# Altium PCB LKS_Motor_0318.PcbDoc (part 2 of 2)
Units mm, origin at the board's own origin, x right, y up, seen from the top; angles counter-clockwise.
Board outline 117 x 10 mm, 2 copper layers (Top Layer, Bottom Layer); 107 components, 71 nets, 323 pads, 186 vias.
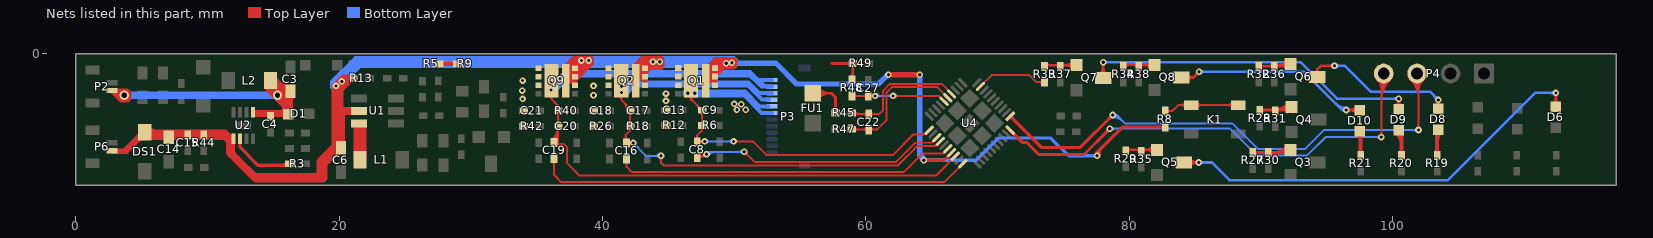
[diagram p2: the nets of this part, all layers, seen from the top]

## Via types
v1: diameter 0.5, hole 0.25, Top Layer to Bottom Layer, 184 vias
v2: diameter 0.7, hole 0.4, Top Layer to Bottom Layer, 2 vias

## Nets (pads, with @x,y where several pads share a name; then routed paths per layer and width w, separated by ;. In a path a pad name is that pad's centre, name@x,y a point inside that pad or via, vN(x,y) a via of type N, cw(c..) or ccw(c..) an arc to the next point about the centre after c; other vN are vias at no path point) (continued)
NetD6_2: D6.2 Q5.3 | length 37.4
  Top Layer w0.2: Q5.3@84.15,-8.255 v1(85.293,-8.255) ; Q5.3@84.581,-8.508 cw(c85.19,-9.117) 85.19,-8.255 cw(c85.19,-7.393) Q5.3@84.581,-8.002 ; v1@85.187,-8.361 ccw(c84.931,-8.617) 84.931,-8.255 ccw(c84.931,-7.893) v1@85.187,-8.149 ; D6.2@112.205,-3.814 ccw(c111.693,-3.302) 112.417,-3.302 ccw(c113.141,-3.302) D6.2@112.629,-3.814 ; v1@112.314,-3.078 cw(c112.067,-3.326) 112.417,-3.326 ; D6.2@112.417,-4.027 112.417,-2.975 v1(112.42,-2.972) ; 112.417,-3.342 cw(c112.791,-3.342) v1@112.526,-3.078
  Bottom Layer w0.2: v1(85.293,-8.255) 86.284,-8.255 87.63,-9.601 104.216,-9.601 110.846,-2.972 v1(112.42,-2.972) ; v1@85.399,-8.361 cw(c85.655,-8.617) 85.655,-8.255 cw(c85.655,-7.893) v1@85.399,-8.149 ; v1@112.314,-3.078 ccw(c112.058,-3.334) 112.058,-2.972 ccw(c112.058,-2.61) v1@112.314,-2.866
NetD8_1: D8.1 R19.1 | length 2.8
  Top Layer w0.3: D8.1@103.306,-5.955 cw(c103.072,-6.189) 103.403,-6.189 ; R19.1@103.403,-7.696 D8.1@103.403,-5.857 ; 103.403,-6.574 cw(c104.279,-6.574) D8.1@103.66,-5.955
NetD8_2: D8.2 Q6.3 | length 15.1
  Top Layer w0.2: Q6.3@94.135,-1.428 ccw(c94.026,-1.194) 94.285,-1.194 ; Q6.3@94.285,-1.753 94.285,-1.194 ; Q6.3@94.435,-1.428 cw(c94.543,-1.194) 94.285,-1.194 ; v1@95.5,-1.02 ccw(c95.243,-1.277) 95.243,-0.914 ccw(c95.243,-0.552) v1@95.5,-0.808 ; v1(95.606,-0.914) 94.564,-0.914 94.285,-1.194 ; D8.2@103.314,-3.927 ccw(c103.122,-3.629) v1@103.476,-3.629 ; v1@103.374,-3.611 cw(c103.126,-3.859) D8.2@103.476,-3.859 ; D8.2@103.476,-4.179 v1@103.476,-3.629 ; D8.2@103.476,-3.876 cw(c103.85,-3.876) v1@103.586,-3.611 ; D8.2@103.639,-3.927 cw(c103.831,-3.629) v1@103.476,-3.629
  Bottom Layer w0.2: v1(95.606,-0.914) 96.393,-0.914 98.349,-2.87 102.845,-2.87 v1(103.48,-3.505) ; v1@95.712,-1.02 cw(c95.968,-1.277) 95.968,-0.914 cw(c95.968,-0.552) v1@95.712,-0.808 ; v1@103.33,-3.505 ccw(c102.967,-3.505) 103.224,-3.249 ccw(c103.48,-2.993) v1@103.48,-3.355
NetD9_1: D9.1 R20.1 | length 3.1
  Top Layer w0.3: D9.1@100.309,-5.98 cw(c99.4,-6.889) 100.686,-6.889 ; D9.1@100.521,-5.768 cw(c100.124,-6.165) D9.1@100.686,-6.165 ; R20.1@100.686,-7.696 D9.1@100.686,-6.003
NetD9_2: D9.2 Q7.3 | length 30.4
  Top Layer w0.2: Q7.3@77.776,-1.576 ccw(c77.166,-0.966) 78.029,-0.966 ccw(c78.891,-0.966) Q7.3@78.281,-1.576 ; v1@77.923,-0.741 cw(c77.667,-0.997) 78.029,-0.997 cw(c78.391,-0.997) v1@78.135,-0.741 ; Q7.3@78.029,-1.829 v1(78.029,-0.635) ; D9.2@100.267,-3.992 ccw(c99.746,-3.472) v1@100.482,-3.472 ; v1@100.376,-3.51 cw(c100.12,-3.766) 100.482,-3.766 cw(c100.845,-3.766) v1@100.588,-3.51 ; D9.2@100.479,-4.204 100.482,-4.201 v1(100.482,-3.404) ; v1@100.482,-3.488 ccw(c101.195,-3.488) D9.2@100.691,-3.992
  Bottom Layer w0.2: v1(78.029,-0.635) 93.015,-0.635 95.783,-3.404 v1(100.482,-3.404) ; v1@78.135,-0.741 cw(c78.391,-0.997) 78.391,-0.635 cw(c78.391,-0.273) v1@78.135,-0.529 ; v1@100.376,-3.51 ccw(c100.12,-3.766) 100.12,-3.404 ccw(c100.12,-3.041) v1@100.376,-3.298
NetD10_1: D10.1 R21.1 | length 2.7
  Top Layer w0.3: D10.1@97.337,-6.056 cw(c96.735,-6.659) 97.587,-6.659 ; R21.1@97.587,-7.696 D10.1@97.587,-5.952 ; 97.587,-6.307 cw(c97.942,-6.307) D10.1@97.691,-6.056
NetD10_2: D10.2 Q8.3 | length 20.2
  Top Layer w0.2: Q8.3@83.972,-1.803 84.887,-1.803 ; Q8.3@84.431,-2.025 cw(c84.887,-2.384) 84.887,-1.803 ; Q8.3@84.431,-1.582 ccw(c84.887,-1.223) 84.887,-1.803 ; v1@85.169,-1.372 cw(c84.806,-1.372) 85.063,-1.628 cw(c85.319,-1.884) v1@85.319,-1.522 ; v1(85.319,-1.372) 84.887,-1.803 ; v1(96.495,-4.267) 97.494,-4.267 D10.2@97.507,-4.281 ; v1@96.601,-4.373 cw(c96.857,-4.629) 96.857,-4.267 cw(c96.857,-3.905) v1@96.601,-4.161 ; 96.751,-4.267 cw(c96.751,-5.037) D10.2@97.295,-4.493 ; 96.815,-4.267 ccw(c96.815,-3.588) D10.2@97.295,-4.068
  Bottom Layer w0.2: v1(85.319,-1.372) 93.294,-1.372 96.19,-4.267 v1(96.495,-4.267) ; v1@85.425,-1.478 cw(c85.681,-1.734) 85.681,-1.372 cw(c85.681,-1.009) v1@85.425,-1.266 ; 95.718,-3.796 ccw(c96.495,-3.019) v1@96.495,-4.117 ; 96.06,-4.137 ccw(c96.495,-3.702) v1@96.495,-4.317
NetK1_1: K1.1 R8.1 | length 9.5
  Top Layer w0.15: R8.1@82.753,-4.343 83.287,-4.343 83.73,-3.9 K1.1@84.725,-3.9 K1.1@88.275,-3.9 ; R8.1@82.88,-4.47 cw(c83.185,-4.776) 83.185,-4.343 cw(c83.185,-3.911) R8.1@82.88,-4.217 ; K1.1@84.331,-4.095 ccw(c83.861,-4.564) 83.861,-3.9 ccw(c83.861,-3.236) K1.1@84.331,-3.706 ; K1.1@85.12,-4.095 cw(c85.589,-4.564) 85.589,-3.9 cw(c85.589,-3.236) K1.1@85.12,-3.706 ; K1.1@87.88,-4.095 ccw(c87.411,-4.564) 87.411,-3.9 ccw(c87.411,-3.236) K1.1@87.88,-3.706
NetL1_1: L1.1 U1.6 | length 20.9
  Top Layer w0.3: U1.6@21.105,-5.399 cw(c20.738,-5.767) 21.257,-5.767 ; L1.1@21.257,-7.998 U1.6@21.257,-5.319 ; 21.257,-6.976 ccw(c22.516,-6.976) L1.1@21.626,-7.866 ; 21.257,-6.252 ccw(c23.24,-6.252) 21.838,-7.654 cw(c22.627,-6.865) 21.511,-6.865 ; U1.6@21.405,-5.399 cw(c21.149,-5.656) 21.511,-5.656 cw(c21.873,-5.656) U1.6@21.617,-5.399 ; 21.511,-7.249 cw(c20.937,-7.249) L1.1@21.343,-7.654 ; U1.6@21.511,-5.293 21.511,-7.972 L1.1@21.59,-8.052 ; U1.6@21.705,-5.399 cw(c21.192,-5.912) 21.917,-5.912 ; L1.1@21.765,-7.947 U1.6@21.765,-5.268 ; 21.765,-7.36 cw(c21.048,-7.36) 21.555,-7.866 ccw(c20.68,-6.992) 21.917,-6.992 ; 21.765,-6.635 cw(c20.324,-6.635) L1.1@21.343,-7.654 ; 21.765,-5.767 cw(c22.284,-5.767) U1.6@21.917,-5.399 ; L1.1@21.917,-8.074 U1.6@21.917,-5.395 ; 21.917,-6.267 cw(c19.956,-6.267) L1.1@21.343,-7.654
NetQ3_1: Q3.1 R27.1 R30.1 | length 10.1
  Top Layer w0.2: R27.1@89.383,-7.493 R30.1@90.576,-7.493 91.77,-7.493 ; R27.1@89.491,-7.602 cw(c89.754,-7.865) 89.754,-7.493 cw(c89.754,-7.121) R27.1@89.491,-7.384 ; R30.1@90.468,-7.602 ccw(c90.205,-7.865) 90.205,-7.493 ccw(c90.205,-7.121) R30.1@90.468,-7.384 ; R30.1@90.602,-7.62 91.237,-7.62 91.465,-7.391 ; R30.1@90.685,-7.678 cw(c90.826,-7.818) R30.1@90.826,-7.62 ; R30.1@90.685,-7.602 cw(c90.948,-7.865) 90.948,-7.493 cw(c90.948,-7.121) R30.1@90.685,-7.384 ; R30.1@90.685,-7.46 ccw(c91.071,-7.075) 91.071,-7.62 ; 90.9,-7.493 ccw(c90.9,-5.937) Q3.1@92,-7.037 ; 91.383,-7.493 ccw(c91.383,-6.42) Q3.1@92.142,-7.179 ; 91.636,-7.391 cw(c91.636,-7.907) Q3.1@92,-7.542 ; Q3.1@91.872,-7.391 91.745,-7.391 ; Q3.1@91.942,-7.114 cw(c91.465,-6.844) 91.465,-7.391 ; 91.465,-7.391 91.745,-7.391 ; 91.745,-7.391 cw(c91.745,-7.667) 91.966,-7.503 ccw(c91.745,-7.667) 91.745,-7.391 ; 91.745,-7.391 ccw(c91.745,-7.238) 91.897,-7.254 cw(c91.745,-7.238) 91.745,-7.391
NetQ4_1: Q4.1 R28.1 R31.1 | length 6.8
  Top Layer w0.2: R28.1@89.84,-4.267 Q4.1@92.151,-4.267 ; R28.1@90.025,-4.401 cw(c90.349,-4.726) 90.349,-4.267 ; R28.1@90.025,-4.184 ccw(c90.226,-3.982) 90.226,-4.267 ; 90.677,-4.267 ccw(c90.677,-3.809) R31.1@91.001,-4.133 ; 90.799,-4.267 cw(c90.799,-4.552) R31.1@91.001,-4.351 ; R31.1@90.915,-4.267 ccw(c90.915,-2.624) Q4.1@92.076,-3.786 ; R31.1@91.219,-4.351 cw(c91.42,-4.552) 91.42,-4.267 ; R31.1@91.219,-4.133 ccw(c91.543,-3.809) 91.543,-4.267 ; 91.398,-4.267 ccw(c91.398,-3.107) Q4.1@92.218,-3.927 ; Q4.1@91.88,-4.267 ccw(c91.88,-3.59) Q4.1@92.359,-4.069
NetQ5_1: Q5.1 R29.1 R35.1 | length 5.5
  Top Layer w0.2: R29.1@79.731,-7.366 79.807,-7.29 Q5.1@82.118,-7.29 ; R29.1@79.865,-7.399 cw(c80.128,-7.662) 80.128,-7.29 cw(c80.128,-6.918) R29.1@79.865,-7.181 ; 80.491,-7.29 cw(c80.491,-7.748) R35.1@80.816,-7.424 ; 80.614,-7.29 ccw(c80.614,-7.005) R35.1@80.816,-7.206 ; R35.1@81.033,-7.424 cw(c81.358,-7.748) 81.358,-7.29 ; R35.1@81.033,-7.206 ccw(c81.235,-7.005) 81.235,-7.29 ; Q5.1@81.866,-7.542 ccw(c81.256,-8.152) 81.256,-7.29 ccw(c81.256,-6.427) Q5.1@81.866,-7.037
NetQ6_1: Q6.1 R32.1 R36.1 | length 6.3
  Top Layer w0.2: R32.1@89.84,-0.94 R36.1@91.034,-0.94 ; R32.1@89.949,-1.049 cw(c90.212,-1.312) 90.212,-0.94 cw(c90.212,-0.568) R32.1@89.949,-0.831 ; R36.1@90.925,-1.049 ccw(c90.662,-1.312) 90.662,-0.94 ccw(c90.662,-0.568) R36.1@90.925,-0.831 ; R36.1@91.142,-1.049 cw(c91.405,-1.312) 91.405,-0.94 cw(c91.405,-0.568) R36.1@91.142,-0.831 ; 91.512,-0.94 ccw(c91.512,-0.056) Q6.1@92.141,-0.677 ; 91.758,-0.94 cw(c91.758,-1.282) Q6.1@92,-1.04 ; Q6.1@91.999,-0.536 cw(c91.034,0.416) R36.1@91.034,-0.94 ; Q6.1@92.253,-0.787 92.1,-0.94 R36.1@91.034,-0.94
NetQ7_1: Q7.1 R33.1 R37.1 | length 5.6
  Top Layer w0.2: R33.1@73.558,-0.94 73.635,-0.864 Q7.1@75.997,-0.864 ; R33.1@73.693,-0.972 cw(c73.956,-1.235) 73.956,-0.864 cw(c73.956,-0.492) R33.1@73.693,-0.755 ; R37.1@74.669,-0.972 ccw(c74.406,-1.235) 74.406,-0.864 ccw(c74.406,-0.492) R37.1@74.669,-0.755 ; R37.1@74.886,-0.972 cw(c75.149,-1.235) 75.149,-0.864 cw(c75.149,-0.492) R37.1@74.886,-0.755 ; Q7.1@75.744,-1.116 ccw(c75.134,-1.726) 75.134,-0.864 ccw(c75.134,-0.001) Q7.1@75.744,-0.611
NetQ8_1: Q8.1 R34.1 R38.1 | length 5.6
  Top Layer w0.2: R34.1@79.527,-0.94 79.629,-0.838 Q8.1@81.94,-0.838 ; R34.1@79.662,-0.972 cw(c79.986,-1.297) 79.986,-0.838 ; R34.1@79.662,-0.755 ccw(c79.863,-0.553) 79.863,-0.838 ; 80.313,-0.838 cw(c80.313,-1.297) R38.1@80.638,-0.972 ; 80.436,-0.838 ccw(c80.436,-0.553) R38.1@80.638,-0.755 ; R38.1@80.855,-0.972 cw(c81.18,-1.297) 81.18,-0.838 ; R38.1@80.855,-0.755 ccw(c81.057,-0.553) 81.057,-0.838 ; Q8.1@81.688,-1.091 ccw(c81.078,-1.701) 81.078,-0.838 ccw(c81.078,0.024) Q8.1@81.688,-0.586
NetR3_1: R3.1 U2.6 | length 5.5
  Top Layer w0.254: U2.6@12.475,-6.436 12.475,-7.116 13.818,-8.458 R3.1@16.231,-8.458 ; 15.603,-8.458 ccw(c15.603,-7.805) R3.1@16.065,-8.267
NetR5_2: R5.2 R9.1 | length 1.4
  Top Layer w0.3: R5.2@27.508,-0.762 R9.1@28.905,-0.762
OC: C27.2 R48.2 U4.16 | length 13
  Top Layer w0.15: R48.2@58.953,-3.2 60.782,-3.2 v1(60.706,-3.2) ; R48.2@59.08,-3.327 cw(c59.386,-3.633) 59.386,-3.2 cw(c59.386,-2.768) R48.2@59.08,-3.074 ; 59.705,-3.2 cw(c59.705,-3.719) C27.2@60.071,-3.352 ; 59.827,-3.2 ccw(c59.827,-2.855) C27.2@60.071,-3.099 ; C27.2@60.325,-3.352 cw(c60.691,-3.719) v1@60.691,-3.2 ; C27.2@60.325,-3.099 ccw(c60.569,-2.855) v1@60.569,-3.2 ; v1@60.582,-3.324 ccw(c60.284,-3.623) 60.284,-3.2 ccw(c60.284,-2.778) v1@60.582,-3.077 ; v1(62.078,-3.2) 65.54,-3.2 U4.16@65.952,-3.613 ; v1@62.201,-3.324 cw(c62.5,-3.623) 62.5,-3.2 cw(c62.5,-2.778) v1@62.201,-3.077
  Bottom Layer w0.15: v1@60.731,-3.2 60.782,-3.2 61.57,-3.2 ; v1@60.83,-3.324 cw(c61.128,-3.623) 61.128,-3.2 cw(c61.128,-2.778) v1@60.83,-3.077 ; v1@61.925,-3.2 61.57,-3.2 ; v1(62.078,-3.2) 61.57,-3.2 ; 61.655,-3.2 cw(c61.655,-3.623) 61.954,-3.324 ccw(c61.655,-3.623) 61.655,-3.2 ; 61.655,-3.2 ccw(c61.655,-2.778) 61.954,-3.077 cw(c61.655,-2.778) 61.655,-3.2
OPA0_IN: C22.1 R47.2 U4.15 | length 12.3
  Top Layer w0.15: R47.2@58.979,-5.791 R47.2@58.928,-5.74 60.884,-5.74 61.57,-5.055 61.57,-2.946 61.976,-2.54 65.445,-2.54 U4.15@66.235,-3.33 ; R47.2@59.131,-5.867 cw(c59.436,-6.173) 59.436,-5.74 cw(c59.436,-5.308) R47.2@59.131,-5.614 ; 59.73,-5.74 ccw(c59.73,-5.222) C22.1@60.097,-5.588 ; 59.853,-5.74 cw(c59.853,-6.086) C22.1@60.097,-5.842 ; C22.1@60.35,-5.842 cw(c60.594,-6.086) 60.594,-5.74 ; C22.1@60.35,-5.588 ccw(c60.717,-5.222) 60.717,-5.74
OPA0_IP: C22.2 R45.2 U4.14 | length 11.9
  Top Layer w0.15: R45.2@59.004,-4.572 C22.2@60.223,-4.572 61.036,-4.572 61.316,-4.293 61.316,-2.794 61.824,-2.286 65.757,-2.286 U4.14@66.518,-3.047 ; R45.2@59.025,-4.475 ccw(c59.258,-4.242) R45.2@59.258,-4.572 ; R45.2@59.131,-4.622 cw(c59.252,-4.744) R45.2@59.252,-4.572 ; R45.2@59.131,-4.369 ccw(c59.62,-3.88) 59.62,-4.572 ; C22.2@60.097,-4.699 ccw(c59.791,-5.004) 59.791,-4.572 ccw(c59.791,-4.14) C22.2@60.097,-4.445 ; C22.2@60.35,-4.699 cw(c60.656,-5.004) 60.656,-4.572 cw(c60.656,-4.14) C22.2@60.35,-4.445
PGND: C13.1 C18.1 C21.1 FU1.2 Q1.5 Q1.6 Q1.7 Q2.5 Q2.6 Q2.7 Q9.5 Q9.6 Q9.7 R12.2 R26.2 R42.2 R45.1 R48.1 R49.1 | length 11.3
  Top Layer w0.203: FU1.2@55.982,-2.997 57.404,-2.997 57.709,-3.302 R45.1@57.709,-4.496 ; FU1.2@56.215,-3.231 cw(c56.779,-3.794) 56.779,-2.997 cw(c56.779,-2.2) FU1.2@56.215,-2.764 ; FU1.2@56.359,-3.374 cw(c57.269,-4.285) 57.269,-2.997 cw(c57.269,-1.709) FU1.2@56.359,-2.62 ; 57.429,-0.711 57.455,-0.737 R49.1@59.004,-0.737 59.004,-1.93 R48.1@58.953,-1.981 ; R45.1@57.601,-4.388 ccw(c57.341,-4.128) 57.709,-4.128 ccw(c58.077,-4.128) R45.1@57.817,-4.388 ; R49.1@58.82,-0.844 ccw(c58.56,-1.105) 58.56,-0.737 ccw(c58.56,-0.369) R49.1@58.82,-0.629 ; R48.1@58.846,-1.797 ccw(c58.463,-1.414) 59.004,-1.414 ; R49.1@58.896,-0.844 cw(c58.636,-1.105) 59.004,-1.105 cw(c59.372,-1.105) R49.1@59.112,-0.844
  other v1: 50.216,-4.242 50.876,-4.242 50.546,-3.835 50.013,-3.81 44.831,-3.581 33.934,-3.429 39.319,-3.15 44.831,-3.023 33.909,-2.794 39.319,-2.438 33.934,-2.032
RED: R33.2 U4.9 | length 6.1
  Top Layer w0.15: U4.9@68.71,-2.482 69.592,-1.6 72.39,-1.6 72.949,-2.159 R33.2@73.558,-2.159 ; R33.2@73.457,-2.286 ccw(c73.152,-2.591) 73.152,-2.159 ccw(c73.152,-1.727) R33.2@73.457,-2.032
SWCLK: P4.4 U4.40 | length 45.3
  Top Layer w0.15: P4.4@98.862,-1.976 cw(c98.139,-2.699) 99.162,-2.699 ; P4.4@98.968,-1.87 cw(c98.501,-2.337) 99.162,-2.337 ; v1@99.038,-6.201 ccw(c98.739,-5.902) 99.162,-5.902 ccw(c99.584,-5.902) v1@99.285,-6.201 ; v1(99.162,-6.325) 99.162,-1.6 P4.4@99.339,-1.422 ; 99.162,-3.557 cw(c101.398,-3.557) P4.4@99.817,-1.976 ; 99.162,-3.195 cw(c101.036,-3.195) P4.4@99.711,-1.87 ; 99.162,-2.833 cw(c100.674,-2.833) P4.4@99.605,-1.764 ; 99.162,-2.471 cw(c100.312,-2.471) P4.4@99.498,-1.658
  Top Layer w0.24: U4.40@70.973,-5.805 71.899,-6.731 72.212,-6.731 73.127,-7.645 76.581,-7.645 v1(78.537,-5.69) ; v1@78.407,-5.69 cw(c78.093,-5.69) 78.315,-5.912 cw(c78.537,-6.133) v1@78.537,-5.82
  Bottom Layer w0.15: v1(78.537,-5.69) 87.681,-5.69 89.713,-7.722 93.523,-7.722 94.92,-6.325 v1(99.162,-6.325) v1@99.187,-6.35 ; v1@78.661,-5.813 cw(c78.959,-6.112) 78.959,-5.69 cw(c78.959,-5.267) v1@78.661,-5.566 ; v1@99.038,-6.448 ccw(c98.739,-6.747) 98.739,-6.325 ccw(c98.739,-5.902) v1@99.038,-6.201
SWDIO: P4.3 U4.1 | length 48.8
  Top Layer w0.15: P4.3@101.402,-1.976 cw(c100.005,-3.373) 101.981,-3.373 ; P4.3@101.508,-1.87 cw(c100.367,-3.011) 101.981,-3.011 ; P4.3@101.614,-1.764 cw(c100.729,-2.649) 101.981,-2.649 ; P4.3@101.72,-1.658 cw(c101.091,-2.287) 101.981,-2.287 ; v1@101.857,-5.667 ccw(c101.559,-5.369) 101.981,-5.369 ccw(c102.403,-5.369) v1@102.105,-5.667 ; v1(101.981,-5.791) P4.3@101.981,-1.524 ; 101.981,-2.883 cw(c103.264,-2.883) P4.3@102.357,-1.976 ; 101.981,-2.521 cw(c102.902,-2.521) P4.3@102.251,-1.87
  Top Layer w0.24: U4.1@71.089,-4.744 U4.1@70.973,-4.744 73.341,-7.112 76.302,-7.112 v1(78.765,-4.648) ; v1@78.635,-4.648 cw(c78.322,-4.648) 78.543,-4.87 cw(c78.765,-5.092) v1@78.765,-4.778
  Bottom Layer w0.15: v1@78.765,-4.823 cw(c78.765,-5.92) 79.541,-5.145 ; v1@78.765,-4.673 cw(c78.765,-5.408) 79.285,-4.888 ; v1(78.765,-4.648) 79.045,-4.648 79.705,-5.309 87.859,-5.309 89.764,-7.214 93.37,-7.214 94.793,-5.791 v1(101.981,-5.791) ; v1@78.765,-4.523 cw(c78.765,-4.896) 79.029,-4.632 ; v1@101.857,-5.915 ccw(c101.559,-6.214) 101.559,-5.791 ccw(c101.559,-5.369) v1@101.857,-5.667
U: C19.1 C20.1 P3.1 P3.2 Q9.10 R40.2 U4.28 | length 96
  Top Layer w0.15: Q9.10@35.97,-2.867 cw(c35.603,-3.233) Q9.10@36.121,-3.233 ; Q9.10@35.97,-2.619 ccw(c35.603,-2.253) Q9.10@36.121,-2.253 ; Q9.10@35.97,-2.359 cw(c35.603,-2.725) Q9.10@36.121,-2.725 ; Q9.10@35.979,-3.235 cw(c35.915,-3.432) 36.121,-3.432 ; Q9.10@36.121,-3.098 cw(c36.448,-3.098) Q9.10@36.217,-2.867 ; Q9.10@36.121,-2.59 cw(c36.448,-2.59) Q9.10@36.217,-2.359 ; Q9.10@36.121,-2.388 ccw(c36.448,-2.388) Q9.10@36.217,-2.619 ; Q9.10@36.121,-2.063 36.121,-3.432 ; C19.1@36.195,-6.528 ccw(c35.154,-5.487) C20.1@36.627,-5.487 ; Q9.10@36.264,-3.235 ccw(c36.328,-3.432) 36.121,-3.432 ; C19.1@36.301,-6.634 ccw(c35.516,-5.849) 36.627,-5.849 ; C19.1@36.408,-6.74 ccw(c35.878,-6.211) 36.627,-6.211 ; C19.1@36.449,-6.934 cw(c36.67,-7.156) 36.67,-6.842 ; C19.1@36.449,-6.681 ccw(c36.838,-6.291) 36.838,-6.842 ; C19.1@36.461,-6.92 cw(c36.624,-7.05) 36.624,-6.842 ; C19.1@36.491,-6.748 ccw(c36.624,-6.701) 36.624,-6.842 ; C19.1@36.514,-6.846 ccw(c36.24,-6.573) 36.627,-6.573 ; C20.1@36.524,-5.629 cw(c36.276,-5.877) 36.627,-5.877 ; C20.1@36.524,-5.375 ccw(c36.276,-5.127) 36.627,-5.127 ; R40.2@36.524,-4.46 cw(c36.276,-4.708) 36.627,-4.708 ; R40.2@36.524,-4.207 ccw(c36.276,-3.959) 36.627,-3.959 ; 36.627,-6.782 36.627,-3.937 ; 36.627,-5.992 cw(c37.14,-5.992) C20.1@36.777,-5.629 ; 36.627,-5.012 ccw(c37.14,-5.012) C20.1@36.777,-5.375 ; 36.627,-4.823 cw(c37.14,-4.823) R40.2@36.777,-4.46 ; R40.2@36.755,-4.188 cw(c36.937,-3.937) 36.627,-3.937 ; U4.28@66.801,-7.785 65.34,-9.246 38.252,-9.246 37.313,-8.306 37.313,-7.087 37.068,-6.842 36.624,-6.842 ; 36.121,-3.432 36.627,-3.937
  Bottom Layer w0.3: v1@36.023,-2.306 cw(c35.607,-2.722) v1@36.195,-2.722 ; v1@36.042,-2.657 ccw(c35.881,-2.388) v1@36.195,-2.388 ; v1@36.042,-2.321 cw(c35.852,-2.637) v1@36.22,-2.637 ; v1@36.046,-2.655 ccw(c35.887,-2.362) v1@36.22,-2.362 ; v1(36.093,-2.743) 37.465,-1.372 37.211,-1.372 ; v1@36.093,-2.643 ccw(c36.093,-1.543) 36.871,-2.321 ; v1@36.093,-2.435 ccw(c36.093,-1.692) 36.619,-2.217 ; v1@36.14,-2.655 cw(c36.398,-2.159) 35.839,-2.159 ; v1@36.174,-2.683 cw(c36.355,-2.548) v1@36.195,-2.388 ; v1@36.22,-2.616 v1@36.22,-2.362 ; 36.698,-1.885 cw(c36.093,-1.281) 36.093,-2.135 ccw(c36.093,-0.667) 37.131,-1.705 ; 51.828,-1.993 P3.1@52.883,-1.993 ; 52.006,-2.171 51.486,-1.651 50.673,-1.651 37.541,-1.651 36.297,-2.896 35.839,-2.896 ; 52.08,-2.245 ccw(c52.642,-1.684) P3.2@52.642,-2.478 ; P3.2@52.603,-2.489 52.07,-2.489 50.952,-1.372 ; P3.2@52.883,-2.493 52.328,-2.493 51.206,-1.372 50.952,-1.372 ; 35.839,-2.896 36.195,-2.896 v1@36.195,-2.388 ; 35.839,-2.896 35.839,-2.515 ; 35.839,-2.515 35.839,-2.159 ; 35.839,-2.515 36.068,-2.515 v1@36.22,-2.362 ; 35.839,-2.159 36.424,-2.159 37.211,-1.372 ; v1@36.195,-2.388 v1@36.22,-2.362 ; v1@36.22,-2.362 ccw(c36.412,-2.554) 36.179,-2.692 cw(c36.412,-2.554) v1@36.22,-2.362 ; 37.211,-1.372 50.673,-1.372 50.952,-1.372
  other v1: 36.093,-2.235
V: C16.1 C17.1 P3.3 P3.4 Q2.10 R18.2 U4.24 | length 81.2
  Top Layer w0.15: Q2.10@41.256,-3.224 cw(c41.151,-3.482) 41.43,-3.482 ; Q2.10@41.329,-3.07 cw(c41.085,-3.314) Q2.10@41.43,-3.314 ; Q2.10@41.329,-2.823 ccw(c41.085,-2.579) Q2.10@41.43,-2.579 ; Q2.10@41.329,-2.613 cw(c41.085,-2.857) Q2.10@41.43,-2.857 ; Q2.10@41.329,-2.365 ccw(c41.085,-2.122) Q2.10@41.43,-2.122 ; 41.43,-3.424 cw(c41.93,-3.424) Q2.10@41.577,-3.07 ; Q2.10@41.43,-2.967 cw(c41.93,-2.967) Q2.10@41.577,-2.613 ; Q2.10@41.43,-2.469 ccw(c41.93,-2.469) Q2.10@41.577,-2.823 ; 41.556,-3.608 cw(c40.831,-4.334) C17.1@41.856,-4.334 ; Q2.10@41.566,-2.356 cw(c41.813,-2.063) Q2.10@41.43,-2.063 41.43,-3.482 ; Q2.10@41.604,-3.224 ccw(c41.71,-3.482) 41.43,-3.482 ; C16.1@41.706,-6.569 ccw(c41.584,-6.448) C16.1@41.756,-6.448 ; 41.812,-3.865 cw(c41.343,-4.334) C17.1@42.006,-4.334 ; C16.1@41.947,-6.559 cw(c42.292,-6.148) 41.756,-6.148 ; C16.1@41.959,-6.899 cw(c42.264,-7.204) 42.264,-6.772 cw(c42.264,-6.34) C16.1@41.959,-6.645 ; R18.2@41.985,-5.375 ccw(c41.679,-5.07) 42.112,-5.07 ccw(c42.544,-5.07) R18.2@42.238,-5.375 ; C17.1@41.985,-4.46 cw(c41.679,-4.766) 42.112,-4.766 cw(c42.544,-4.766) C17.1@42.238,-4.46 ; R18.2@42.031,-5.662 cw(c41.965,-5.793) 42.112,-5.793 ; R18.2@42.192,-5.662 ccw(c42.258,-5.793) 42.112,-5.793 ; v1@42.208,-6.896 ccw(c41.909,-7.194) 41.909,-6.772 ccw(c41.909,-6.349) v1@42.208,-6.648 ; v1(42.332,-6.772) C16.1@41.832,-6.772 41.756,-6.772 41.756,-6.148 ; v1@44.326,-7.871 cw(c44.028,-8.169) 44.45,-8.169 cw(c44.872,-8.169) v1@44.574,-7.871 ; v1(44.45,-7.747) 44.45,-8.28 44.654,-8.484 62.432,-8.484 63.902,-7.015 65.308,-7.015 U4.24@65.67,-6.654 ; 65.018,-7.015 ccw(c65.018,-6.469) U4.24@65.404,-6.855 ; 41.43,-3.482 42.112,-4.164 C17.1@42.112,-4.334 R18.2@42.112,-5.502 42.112,-5.793 ; 41.756,-6.148 42.112,-5.793
  Bottom Layer w0.15: v1@42.332,-6.947 cw(c42.332,-7.369) 42.631,-7.071 cw(c42.929,-6.772) v1@42.507,-6.772 ; v1(42.332,-6.772) 43.307,-7.747 v1(44.45,-7.747) ; v1@44.326,-7.871 ccw(c44.028,-8.169) 44.028,-7.747 ccw(c44.028,-7.325) v1@44.326,-7.623
  Bottom Layer w0.3: 41.148,-2.769 ccw(c41.551,-2.769) v1@41.356,-3.122 ; 41.148,-2.672 cw(c41.559,-2.672) v1@41.352,-2.316 ; 41.173,-2.896 v1@41.453,-2.896 ; 41.173,-2.861 ccw(c41.459,-2.861) v1@41.439,-3.146 ; 41.173,-2.63 cw(c41.537,-2.63) v1@41.35,-2.318 ; 41.173,-2.489 41.173,-2.54 ; v1@41.412,-2.685 ccw(c41.492,-2.299) 41.771,-2.578 ; v1@41.453,-3.146 ccw(c41.453,-2.525) 41.892,-2.965 ; v1@41.454,-2.389 ccw(c41.462,-1.863) 41.834,-2.235 ; v1@41.46,-2.847 cw(c41.481,-2.54) 41.173,-2.54 ; v1@41.473,-2.391 ccw(c41.627,-1.647) 42.164,-2.184 ; v1@41.501,-2.859 cw(c41.831,-2.261) 41.148,-2.261 ; v1@41.504,-3.124 41.504,-3.073 42.393,-2.184 ; v1@41.553,-2.946 cw(c41.917,-2.946) 41.659,-2.689 ; v1@41.553,-2.943 cw(c42.513,-2.915) 41.834,-2.235 ; 41.927,-2.65 cw(c41.453,-2.176) 41.453,-2.846 ccw(c41.453,-1.501) 42.404,-2.452 ; 49.606,-2.413 49.783,-2.413 ; 50.368,-2.413 50.114,-2.413 ; 50.521,-2.184 50.267,-2.184 ; 51.459,-2.564 51.308,-2.413 ; P3.4@52.654,-3.48 52.121,-3.48 51.054,-2.413 ; P3.3@52.883,-2.993 51.888,-2.993 51.079,-2.184 ; 41.148,-3.124 41.148,-2.261 ; 41.148,-3.124 41.732,-3.124 42.443,-2.413 50.114,-2.413 ; 41.148,-3.124 41.173,-3.099 41.173,-2.54 ; 41.148,-2.261 41.224,-2.184 41.834,-2.184 ; 41.173,-2.54 41.529,-2.184 41.834,-2.184 ; v1@41.453,-2.896 42.164,-2.184 ; v1@41.453,-2.896 41.453,-2.616 41.834,-2.235 ; 41.834,-2.235 41.834,-2.184 ; 41.834,-2.184 42.164,-2.184 ; 42.164,-2.184 42.393,-2.184 ; 42.393,-2.184 49.632,-2.184 ; 49.632,-2.184 50.267,-2.184 ; 49.632,-2.184 49.886,-2.184 50.114,-2.413 ; 50.114,-2.413 51.054,-2.413 ; 50.267,-2.184 51.079,-2.184 ; 51.054,-2.413 51.308,-2.413 ; 51.079,-2.184 51.308,-2.413
  other v1: 41.453,-2.946 41.453,-2.489
VB1: C19.2 U4.30 | length 33.8
  Top Layer w0.15: C19.2@36.195,-8.153 cw(c35.89,-8.459) 36.322,-8.459 cw(c36.754,-8.459) C19.2@36.449,-8.153 ; C19.2@36.322,-7.95 36.322,-9.195 36.881,-9.754 37.211,-9.754 65.964,-9.754 U4.30@67.367,-8.351
VB2: C16.2 U4.26 | length 26.6
  Top Layer w0.15: C16.2@41.706,-8.194 cw(c41.4,-8.499) 41.832,-8.499 cw(c42.264,-8.499) C16.2@41.959,-8.194 ; C16.2@41.832,-7.991 41.832,-8.584 42.24,-8.992 62.877,-8.992 64.287,-7.581 65.874,-7.581 U4.26@66.235,-7.219
VB3: C8.2 U4.23 | length 23.8
  Top Layer w0.15: C8.2@47.193,-7.925 C8.2@47.244,-7.976 ; C8.2@47.32,-7.95 cw(c47.687,-8.317) 47.687,-7.798 ; C8.2@47.32,-7.697 ccw(c47.564,-7.452) 47.564,-7.798 ; 47.525,-7.798 ccw(c47.525,-7.366) v1@47.884,-7.606 ; v1@47.752,-7.747 47.701,-7.798 47.244,-7.798 ccw(c47.244,-7.178) v1@47.759,-7.523 ; v1@50.775,-7.617 cw(c50.775,-8.04) 51.073,-7.741 cw(c51.372,-7.442) v1@50.95,-7.442 ; v1(50.775,-7.442) 51.537,-8.204 62.306,-8.204 63.754,-6.756 65.001,-6.756 U4.23@65.387,-6.371
  Bottom Layer w0.15: v1@47.803,-7.747 48.108,-7.442 v1(50.775,-7.442) ; v1@47.922,-7.638 cw(c48.394,-8.11) 48.394,-7.442 ; v1@48.028,-7.744 cw(c48.756,-8.472) 48.756,-7.442 ; v1@50.651,-7.566 ccw(c50.352,-7.865) 50.352,-7.442 ccw(c50.352,-7.02) v1@50.651,-7.318
  other v1: 47.904,-7.62
VBAT_8V4: C6.2 C14.2 C15.2 DS1.1 P6.2 Q1.2 Q1.3 Q1.4 Q1.9 Q2.2 Q2.3 Q2.4 Q2.9 Q9.2 Q9.3 Q9.4 Q9.9 R8.2 R13.1 R44.1 U1.5 U2.5 U4.27 | length 309.3
  Top Layer w0.203: P6.2@2.751,-7.363 3.712,-7.363 3.644,-7.43 3.023,-7.43 cw(c3.178,-7.576) 3.178,-7.363 cw(c3.178,-7.149) P6.2@3.023,-7.295 ; P6.2@2.776,-7.506 3.737,-7.506 3.898,-7.506 5.232,-6.172 DS1.1@5.232,-5.967 ; P6.2@2.802,-7.286 3.763,-7.286 ; DS1.1@5.37,-5.704 ccw(c5.764,-5.31) 5.764,-5.867 ; DS1.1@5.385,-5.867 9.728,-5.867 10.77,-5.867 ; DS1.1@5.514,-6.124 cw(c6.133,-6.743) 6.133,-5.867 ; DS1.1@5.514,-5.56 ccw(c6.255,-4.82) 6.255,-5.867 ; DS1.1@5.559,-5.867 cw(c5.559,-7.713) C14.2@6.864,-6.408 ; 6.049,-5.867 cw(c6.049,-7.222) C14.2@7.007,-6.264 ; 6.54,-5.867 cw(c6.54,-6.732) C14.2@7.151,-6.12 ; C14.2@6.971,-6.12 cw(c7.582,-6.732) 7.582,-5.867 ; C14.2@7.115,-6.264 cw(c8.073,-7.222) 8.073,-5.867 ; C14.2@7.259,-6.408 cw(c8.564,-7.713) C15.2@8.564,-5.867 ; 7.651,-5.867 cw(c7.651,-6.929) C15.2@8.401,-6.178 ; 8.141,-5.867 cw(c8.141,-6.439) C15.2@8.545,-6.035 ; C15.2@8.473,-6.035 cw(c8.877,-6.439) 8.877,-5.867 ; C15.2@8.617,-6.178 cw(c9.367,-6.929) 9.367,-5.867 ; 8.87,-5.867 cw(c8.87,-6.929) R44.1@9.62,-6.178 ; 9.36,-5.867 cw(c9.36,-6.439) R44.1@9.764,-6.035 ; R44.1@9.692,-6.035 cw(c10.096,-6.439) 10.096,-5.867 ; R44.1@9.836,-6.178 cw(c10.587,-6.929) 10.587,-5.867 ; 11.711,-6.247 ccw(c11.711,-5.921) U2.5@11.941,-6.151 ; U2.5@11.933,-6.161 cw(c11.786,-6.077) 11.786,-6.247 ; C6.2@19.945,-6.826 ccw(c19.468,-6.349) 20.142,-6.349 ccw(c20.817,-6.349) C6.2@20.34,-6.826 ; 20.041,-4.242 20.142,-4.343 20.422,-4.343 ; C6.2@20.142,-7.15 20.142,-4.623 ; v1@20.152,-2.047 20.345,-1.854 ; Q9.4@37.85,-1.016 Q9.4@37.921,-1.087 ; 10.77,-5.867 11.407,-5.867 U2.5@11.975,-6.436 11.786,-6.247 ; 10.77,-5.867 11.205,-5.867 11.584,-6.247 11.786,-6.247
  Top Layer w0.25: U2.5@11.975,-6.436 11.975,-8.013 13.132,-9.169 18.263,-9.169 18.593,-8.839 18.593,-8.56 18.593,-7.912 19.355,-7.15 C6.2@20.142,-7.15 ; C6.2@19.961,-7.331 ccw(c19.524,-7.768) 19.524,-7.15 ccw(c19.524,-6.532) C6.2@19.961,-6.969 ; v1(64.414,-8.077) 65.943,-8.077 U4.27@66.518,-7.502 ; v1@64.503,-8.166 cw(c64.716,-8.379) 64.716,-8.077 cw(c64.716,-7.775) v1@64.503,-7.989 ; v1@77.447,-7.747 cw(c77.819,-7.747) 77.556,-7.483 ; v1(77.572,-7.747) 77.572,-7.468 79.477,-5.563 R8.2@82.753,-5.563 ; v1@77.697,-7.747 cw(c78.673,-7.747) 77.983,-7.057 ; R8.2@82.662,-5.654 ccw(c82.442,-5.874) 82.442,-5.563 ccw(c82.442,-5.251) R8.2@82.662,-5.471
  Top Layer w0.4: 3.712,-7.363 DS1.1@5.107,-5.967 ; 4.293,-6.781 cw(c5.232,-7.72) DS1.1@5.232,-6.392 ; Q9.9@37.222,-0.993 ccw(c37.222,-0.167) 37.806,-0.751 ; Q9.9@37.401,-1.156 37.567,-0.991 ; Q9.2@37.921,-2.387 37.921,-1.957 ; Q9.4@37.921,-1.087 Q9.3@37.921,-1.737 38.1,-1.557 38.1,-0.457 v1@38.405,-0.457 ; Q9.3@37.933,-1.721 ccw(c37.933,-1.18) 38.316,-1.562 ; Q9.4@37.948,-1.082 cw(c38.522,-0.89) 38.094,-0.463 37.567,-0.991 ; Q9.3@38.031,-1.847 39.167,-0.711 39.167,-0.356 v1@38.506,-0.356 ; 38.405,-1.473 v1@38.405,-0.457 ; 38.557,-1.168 38.633,-1.245 v1@38.633,-0.457 ; 38.591,-1.287 ccw(c37.812,-0.508) v1@38.914,-0.508 ; v1@38.913,-0.457 v1@38.633,-0.457 ; v1@38.928,-0.543 ccw(c38.475,-0.997) 38.475,-0.356 37.846,-0.356 37.222,-0.979 Q9.9@37.222,-2.063 37.594,-2.063 ; v1(38.964,-0.508) 38.964,-0.694 37.594,-2.063 ; Q2.9@42.434,-1.377 ccw(c42.637,-0.763) Q2.4@43.095,-1.221 ; Q2.9@42.443,-1.423 cw(c43.216,-2.196) Q2.4@43.217,-1.102 ; Q2.9@42.531,-1.651 42.665,-1.651 43.554,-0.762 ; Q2.9@42.531,-0.993 ccw(c42.531,-0.167) 43.115,-0.751 ; Q2.9@42.56,-0.998 ccw(c42.866,-0.074) 43.554,-0.762 ; Q2.9@42.591,-2.012 cw(c43.216,-2.637) Q2.3@43.216,-1.752 ; Q2.9@42.595,-1.019 ccw(c43.089,-0.519) 43.586,-1.016 ; Q2.9@42.623,-1.085 cw(c43.345,-1.085) 42.834,-0.574 ; 42.978,-1.625 ccw(c42.44,-1.087) Q2.4@43.201,-1.087 ; Q2.2@43.229,-2.387 Q2.4@43.229,-1.087 43.554,-0.762 ; Q2.4@43.242,-1.071 ccw(c43.242,-0.371) 43.737,-0.866 ; Q2.3@43.258,-1.737 cw(c44.204,-1.737) 43.535,-1.067 ; Q2.3@43.258,-1.733 cw(c44.318,-1.526) 43.554,-0.762 ; Q2.4@43.257,-1.091 cw(c43.688,-1.209) v1@43.688,-0.762 ; Q2.4@43.258,-1.085 cw(c44.135,-0.98) 43.51,-0.356 ; 43.614,-0.356 cw(c43.614,-1.344) v1@44.313,-0.645 ; v1@43.86,-0.762 ccw(c43.86,-0.121) v1@44.313,-0.574 ; v1@44.304,-0.586 cw(c43.586,-0.202) 43.586,-1.016 ; Q1.9@47.844,-1.961 ccw(c47.844,-1.155) Q1.3@48.414,-1.725 ; Q1.9@47.844,-1.178 48.158,-0.864 ; Q1.9@47.844,-0.984 ccw(c47.844,-0.515) 48.176,-0.846 ; Q1.9@47.866,-1.156 cw(c48.234,-1.524) Q1.4@48.521,-1.091 ; Q1.9@47.906,-1.008 ccw(c48.259,-0.62) Q1.4@48.629,-0.991 ; 48.241,-1.378 48.158,-1.295 48.158,-0.864 ; 48.302,-1.838 cw(c48.53,-2.065) Q1.3@48.53,-1.743 ; Q1.4@48.434,-0.969 48.692,-0.711 ; Q1.2@48.543,-2.377 Q1.3@48.543,-1.727 ; Q1.4@48.563,-1.064 ccw(c48.809,-0.651) 49.149,-0.991 ; Q1.4@48.567,-1.089 cw(c48.803,-1.325) 48.803,-0.991 ; Q1.4@48.567,-1.088 cw(c49.403,-1.827) v1(49.403,-0.711) ; Q1.3@48.568,-1.718 cw(c49.029,-1.39) Q1.4@48.629,-0.991 ; Q1.3@48.571,-1.727 cw(c48.955,-1.727) 48.684,-1.456 ; Q1.4@48.571,-1.077 cw(c49.164,-1.077) 48.745,-0.658 ; 49.097,-0.881 ccw(c49.283,-0.777) 49.283,-0.991 ; 49.123,-0.501 cw(c49.211,-0.566) 49.211,-0.457 ; v1@49.357,-0.731 ccw(c48.946,-0.903) 48.946,-0.457 ; v1@49.367,-0.677 cw(c48.629,0.033) Q1.4@48.629,-0.991 ; v1@49.416,-0.759 cw(c49.589,-1.388) 50.051,-0.927 ; v1@49.443,-0.741 cw(c50.013,-1.17) 50.013,-0.457 ; v1@49.447,-0.687 ccw(c49.962,-0.402) 49.962,-0.991 ; 49.547,-0.457 cw(c49.547,-0.651) v1@49.726,-0.576 ; v1(61.722,-1.6) v1(64.11,-1.6) ; 37.567,-0.991 37.567,-2.035 37.594,-2.063 ; v1@38.405,-0.457 v1@38.633,-0.457 ; Q2.9@42.531,-2.063 42.54,-2.063 43.586,-1.016 ; Q2.9@42.531,-2.063 42.531,-1.335 43.51,-0.356 ; Q2.9@42.531,-2.063 42.531,-0.878 43.053,-0.356 43.51,-0.356 ; 43.51,-0.356 43.51,-0.432 v1@43.84,-0.762 ; 43.51,-0.356 44.45,-0.356 44.526,-0.432 v1@44.526,-0.66 ; 43.554,-0.762 v1@43.688,-0.762 ; 43.586,-1.016 cw(c43.378,-0.808) 43.249,-1.072 ccw(c43.378,-0.808) 43.586,-1.016 ; 43.586,-1.016 44.475,-1.016 ; 43.586,-1.016 v1@43.84,-0.762 ; v1@43.688,-0.762 v1@43.84,-0.762 ; v1@43.84,-0.762 44.425,-0.762 v1@44.526,-0.66 ; 44.475,-1.016 44.526,-0.965 ; 44.475,-1.016 44.526,-0.965 ; 44.526,-0.965 v1@44.526,-0.66 ; 48.158,-0.864 cw(c47.867,-0.573) 47.848,-0.984 ccw(c47.867,-0.573) 48.158,-0.864 ; 48.158,-0.864 48.565,-0.457 48.946,-0.457 ; Q1.4@48.629,-0.991 47.844,-1.776 Q1.9@47.844,-2.054 48.086,-2.054 48.543,-1.597 49.149,-0.991 ; Q1.4@48.629,-0.991 49.149,-0.991 ; 48.692,-0.711 ccw(c48.994,-1.013) 48.571,-1.075 cw(c48.994,-1.013) 48.692,-0.711 ; 48.692,-0.711 v1(49.403,-0.711) ; 48.692,-0.711 48.946,-0.457 ; 48.946,-0.457 50.013,-0.457 ; 49.149,-0.991 49.962,-0.991 ; v1(49.403,-0.711) 49.835,-0.711 49.962,-0.838 49.962,-0.991 ; 49.962,-0.991 50.063,-0.889 50.063,-0.508 50.013,-0.457 ; Q2.4@43.253,-1.098 cw(c43.451,-1.295) 43.451,-1.016 ccw(c43.451,-1.295) Q2.4@43.253,-1.098 ; Q1.9@47.844,-1.168 cw(c47.844,-1.619) 48.163,-1.3 ccw(c47.844,-1.619) Q1.9@47.844,-1.168
  Top Layer w0.6: DS1.1@5.232,-5.967 5.514,-6.248 11.354,-6.248 11.709,-6.604 11.709,-7.493 12.217,-8.001 ; 12.268,-8.052 13.691,-9.474 18.263,-9.474 ; 20.041,-4.242 20.041,-2.692 R13.1@20.879,-1.854 ; v1@20.168,-2.063 cw(c20.671,-2.567) 20.671,-1.854 ; v1@20.203,-2.148 ccw(c20.203,-1.227) R13.1@20.855,-1.878 ; U1.5@21.511,-4.343 20.422,-4.343 20.142,-4.623 C6.2@20.142,-7.15 20.034,-7.15 18.828,-8.357 ; 18.263,-9.474 18.771,-9.474 18.828,-9.417 18.828,-8.357 ; 18.263,-9.474 18.593,-9.144 18.593,-8.166 18.828,-7.931 ; 18.828,-8.357 18.828,-7.931 ; 18.828,-7.931 19.71,-7.048 19.71,-2.515 20.371,-1.854 ; 20.371,-1.854 R13.1@20.879,-1.854 ; 20.371,-1.854 R13.1@20.879,-1.854
  Bottom Layer w0.25: v1@64.491,-8.001 v1(64.414,-8.077) 68.402,-8.077 70.079,-6.401 71.526,-6.401 ; v1@64.503,-8.166 cw(c64.716,-8.379) 64.716,-8.077 cw(c64.716,-7.775) v1@64.503,-7.989 ; 73.457,-6.401 71.526,-6.401 ; v1@77.483,-7.835 ccw(c77.27,-8.049) 77.27,-7.747 ccw(c77.27,-7.445) v1@77.483,-7.659 ; v1(77.572,-7.747) 75.413,-7.747 74.066,-6.401 71.526,-6.401
  Bottom Layer w0.4: v1@19.888,-2.438 19.888,-2.057 21.565,-0.381 ; v1(20.203,-2.098) 21.692,-0.61 ; 22.149,-0.381 21.565,-0.381 ; v1@38.536,-0.381 cw(c38.536,-0.935) v1@38.928,-0.543 ; v1@38.964,-0.533 v1@44.348,-0.533 ; v1@38.999,-0.543 cw(c39.391,-0.935) 39.391,-0.381 ; v1@39.192,-0.533 39.116,-0.61 21.692,-0.61 ; 43.676,-0.381 cw(c43.676,-1.282) 44.313,-0.645 ccw(c44.044,-0.914) v1@44.044,-0.533 ; v1@44.348,-0.737 v1@49.403,-0.737 ; v1@44.384,-0.645 cw(c45.021,-1.282) 45.021,-0.381 ; v1@44.384,-0.574 ccw(c44.776,-0.182) 44.776,-0.737 ; 48.485,-0.381 cw(c48.485,-1.629) v1@49.368,-0.747 ; 49.083,-0.569 cw(c49.373,-0.698) 49.373,-0.381 ; v1@49.449,-0.731 cw(c49.987,-0.97) 49.987,-0.381 ; 49.451,-0.381 cw(c49.451,-0.663) 49.65,-0.464 ; v1@49.886,-0.813 50.063,-0.813 49.987,-0.889 49.886,-0.889 21.844,-0.889 21.539,-0.889 19.71,-2.718 19.507,-2.515 ; v1@49.886,-0.711 53.162,-0.711 54.737,-2.286 60.96,-2.286 61.646,-1.6 v1(61.722,-1.6) ; v1@49.886,-0.533 49.936,-0.533 v1@50,-0.597 ; 50.19,-0.686 50.19,-0.584 49.987,-0.381 ; 64.11,-7.221 ccw(c65.271,-7.221) v1@64.45,-8.042 ; v1(64.11,-1.6) 64.11,-7.772 v1(64.414,-8.077) ; 19.507,-2.515 19.507,-2.134 21.26,-0.381 21.92,-0.381 ; 19.507,-2.515 19.507,-2.438 21.565,-0.381 ; 21.692,-0.61 21.92,-0.381 ; 21.92,-0.381 49.403,-0.381 49.987,-0.381
  other v1: 19.761,-2.438 49.835,-0.686 43.84,-0.61 44.348,-0.61 38.405,-0.508
VIN: C3.2 C4.1 D1.1 L2.2 P2.2 U2.1 | length 91.6
  Top Layer w0.3: P2.2@2.701,-2.791 ccw(c2.791,-2.791) P2.2@2.728,-2.855 ; 3.096,-3.02 cw(c3.325,-2.791) 3.001,-2.791 ccw(c3.816,-2.791) 3.24,-3.367 ; 3.251,-2.791 cw(c3.251,-3.38) v2@3.771,-3.103 ; 3.259,-3.116 cw(c3.529,-3.386) v2@3.737,-3.066 ; v2@3.507,-3.244 ccw(c2.751,-3.647) P2.2@2.751,-2.791 ; 3.751,-2.791 cw(c3.751,-3.113) 4.036,-2.961 ; U2.1@13.475,-4.436 15.952,-4.436 16.142,-4.626 16.142,-3.746 ; U2.1@13.501,-4.664 D1.1@15.977,-4.664 ; 13.957,-4.436 cw(c13.957,-5.499) 14.709,-4.747 ccw(c14.509,-4.947) 14.509,-4.664 ; L2.2@14.533,-2.182 ccw(c15.283,-2.182) 14.753,-2.713 ; L2.2@14.545,-2.105 ccw(c15.316,-2.354) 14.743,-2.927 ; 14.559,-2.786 cw(c14.814,-2.786) L2.2@14.801,-2.532 ; C4.1@14.644,-4.535 cw(c14.884,-4.775) C4.1@14.884,-4.436 ; C4.1@14.681,-4.436 cw(c14.681,-4.775) C4.1@14.921,-4.535 ; 14.735,-2.918 ccw(c15.012,-2.641) v2@15.214,-2.978 ; L2.2@14.783,-2.386 16.142,-3.746 ; L2.2@14.783,-1.932 cw(c14.783,-2.856) 15.436,-2.203 ; L2.2@14.812,-2.416 cw(c14.078,-3.15) v2@15.116,-3.15 ; L2.2@14.83,-2.197 ccw(c15.841,-2.523) v2@15.09,-3.274 ; L2.2@14.833,-2.182 ccw(c16.308,-2.182) v2@15.265,-3.225 ; 14.846,-2.807 ccw(c15.211,-2.442) v2@15.287,-2.952 ; L2.2@14.96,-2.032 15.265,-2.032 16.358,-3.124 16.358,-3.48 ; L2.2@15.032,-2.635 ccw(c14.783,-2.884) L2.2@14.783,-2.532 ; 15.057,-4.664 ccw(c15.057,-4.947) 14.856,-4.747 cw(c15.608,-5.499) 15.608,-4.436 ; L2.2@15.062,-2.184 16.358,-3.48 ; L2.2@15.074,-2.323 cw(c14.248,-3.15) v2@15.416,-3.15 ; 15.083,-2.686 ccw(c15.695,-2.073) C3.2@16.178,-2.793 ; L2.2@15.116,-2.289 ccw(c16.366,-2.692) 15.437,-3.621 ; L2.2@15.195,-2.445 ccw(c15.744,-1.897) C3.2@16.177,-2.539 ; 15.201,-4.436 cw(c15.201,-5.517) D1.1@15.966,-4.752 ; 15.244,-2.756 cw(c15.322,-3.179) 15.626,-2.875 ; L2.2@15.274,-2.523 cw(c15.615,-2.182) L2.2@15.133,-2.182 ; v2@15.298,-3.051 cw(c15.447,-3.863) C3.2@16.03,-3.279 ; v2@15.316,-3.35 cw(c15.316,-4.387) 16.05,-3.654 ; 15.324,-4.664 ccw(c15.324,-3.758) 15.966,-4.399 ccw(c15.539,-3.972) 16.142,-3.972 ccw(c16.746,-3.972) D1.1@16.319,-4.399 ; v2@15.34,-2.944 ccw(c15.902,-2.382) C3.2@16.345,-3.042 ; 15.341,-2.463 ccw(c14.783,-3.022) 14.783,-2.232 cw(c14.783,-3.88) C3.2@15.948,-2.715 ; v2@15.381,-3.342 cw(c14.148,-4.575) D1.1@15.892,-4.575 ; 15.411,-2.534 ccw(c15.795,-2.15) C3.2@16.154,-2.557 ; 15.437,-2.203 ccw(c16.17,-1.471) C3.2@16.282,-2.501 ; 15.453,-2.702 ccw(c15.951,-2.204) C3.2@16.345,-2.788 ; v2@15.506,-3.213 ccw(c16.087,-3.405) 15.654,-3.838 ; v2@15.516,-3.15 ccw(c16.306,-3.15) 15.747,-3.708 ; v2@15.524,-3.128 cw(c16.47,-2.182) L2.2@15.133,-2.182 ; 15.586,-2.835 cw(c15.272,-3.15) 15.716,-3.15 ; v2@15.598,-3.202 ccw(c16.11,-2.691) C3.2@16.512,-3.291 ; 15.636,-2.886 ccw(c14.783,-3.739) L2.2@14.783,-2.532 ; 15.637,-2.76 ccw(c16.007,-2.39) C3.2@16.352,-2.782 ; 15.672,-4.436 16.142,-3.965 16.142,-3.746 ; 15.71,-2.959 ccw(c16.158,-2.511) C3.2@16.513,-3.036 ; 15.777,-3.737 cw(c17.332,-2.182) L2.2@15.133,-2.182 ; 15.829,-3.79 15.829,-4.013 ; 15.853,-2.975 ccw(c14.783,-4.046) L2.2@14.783,-2.532 ; 15.879,-2.646 ccw(c16.257,-2.269) C3.2@16.314,-2.799 ; 15.893,-3.854 cw(c15.172,-4.575) D1.1@16.192,-4.575 ; D1.1@15.969,-4.396 ccw(c15.085,-3.48) 16.358,-3.48 ; D1.1@16.002,-4.369 ccw(c15.82,-4.103) 16.142,-4.103 ; D1.1@16.028,-4.353 ccw(c15.931,-4.166) 16.142,-4.166 ; D1.1@16.064,-4.523 16.358,-4.23 16.358,-3.48 ; D1.1@16.142,-4.575 15.829,-4.262 15.829,-4.013 ; 16.142,-3.763 cw(c16.876,-3.763) C3.2@16.443,-3.171 ; 16.142,-3.424 cw(c16.353,-3.424) C3.2@16.331,-3.214 ; C3.2@16.143,-3.148 cw(c15.626,-3.665) 16.358,-3.665 ; D1.1@16.177,-4.611 ccw(c15.767,-4.186) D1.1@16.358,-4.186 ; D1.1@16.257,-4.353 cw(c16.353,-4.166) 16.142,-4.166 ; D1.1@16.283,-4.369 cw(c16.464,-4.103) 16.142,-4.103 ; C3.2@16.46,-3.227 ccw(c14.783,-4.905) L2.2@14.783,-2.532 ; P2.2@2.751,-2.791 3.324,-2.791 ; P2.2@2.751,-2.791 3.883,-2.791 4.064,-2.972 4.064,-3.404 3.912,-3.556 3.429,-3.556 2.751,-2.878 P2.2@2.751,-2.791 ; P2.2@2.751,-2.791 2.867,-2.791 3.226,-3.15 3.324,-3.051 3.324,-2.791 ; P2.2@2.751,-2.791 3.324,-2.791 ; 3.324,-2.791 v2(3.683,-3.15) 3.324,-2.791 ; 14.783,-2.743 cw(c15.057,-2.743) 14.936,-2.496 ccw(c15.057,-2.743) 14.783,-2.743 ; 14.783,-2.743 ccw(c14.508,-2.743) 14.629,-2.496 cw(c14.508,-2.743) 14.783,-2.743 ; 14.783,-2.743 16.142,-4.103 ; 14.783,-2.743 L2.2@14.783,-2.032 ; L2.2@14.783,-2.032 14.559,-2.255 14.559,-2.743 15.829,-4.013 ; L2.2@14.783,-2.032 16.142,-3.392 16.142,-3.746 ; 16.142,-4.166 16.142,-4.103 ; 16.358,-3.42 cw(c16.742,-3.42) C3.2@16.47,-3.148 ; 16.358,-3.42 cw(c16.742,-3.42) C3.2@16.47,-3.148 ; 16.358,-3.42 cw(c16.742,-3.42) C3.2@16.47,-3.148 ; C3.2@16.188,-3.183 cw(c16.008,-3.482) 16.358,-3.482 ccw(c16.008,-3.482) C3.2@16.188,-3.183
  Bottom Layer w0.3: 14.503,-3.15 v2(15.316,-3.15) ; v2@15.175,-3.291 ccw(c14.833,-3.632) 14.833,-3.15 ccw(c14.833,-2.667) v2@15.175,-3.008
  Bottom Layer w0.6: v2(3.683,-3.15) 14.503,-3.15 v2(15.316,-3.15)
VS3: C8.1 C9.1 P3.5 P3.6 Q1.10 R6.2 U4.21 | length 60.6
  Top Layer w0.15: Q1.10@46.452,-3.168 cw(c46.374,-3.529) 46.743,-3.529 ; Q1.10@46.484,-3.022 cw(c46.414,-3.343) 46.743,-3.343 ; Q1.10@46.516,-2.875 cw(c46.455,-3.157) Q1.10@46.743,-3.157 ; Q1.10@46.548,-2.728 cw(c46.495,-2.971) Q1.10@46.743,-2.971 ; Q1.10@46.575,-3.216 cw(c46.476,-3.465) 46.743,-3.465 ; 46.743,-3.538 cw(c47.119,-3.538) Q1.10@47.048,-3.169 ; 46.743,-3.357 cw(c47.084,-3.357) Q1.10@47.02,-3.022 ; Q1.10@46.743,-3.175 cw(c47.05,-3.175) Q1.10@46.992,-2.874 ; Q1.10@46.743,-2.997 46.743,-3.465 ; Q1.10@46.743,-2.994 cw(c47.015,-2.994) Q1.10@46.964,-2.727 ; Q1.10@46.912,-3.216 ccw(c47.011,-3.465) 46.743,-3.465 ; C8.1@47.072,-6.472 ccw(c46.821,-6.198) 47.193,-6.198 ; 47.142,-3.863 cw(c46.706,-4.299) C9.1@47.322,-4.299 ; C8.1@47.314,-6.472 cw(c47.565,-6.198) 47.193,-6.198 ; C8.1@47.32,-6.807 cw(c47.687,-7.174) v1@47.687,-6.655 ; C8.1@47.32,-6.554 ccw(c47.564,-6.309) v1@47.564,-6.655 ; C9.1@47.326,-4.047 ccw(c47.501,-3.872) C9.1@47.501,-4.12 ; R6.2@47.451,-5.315 ccw(c47.145,-5.01) 47.577,-5.01 ccw(c48.01,-5.01) R6.2@47.704,-5.315 ; C9.1@47.451,-4.425 cw(c47.145,-4.731) 47.577,-4.731 cw(c48.01,-4.731) C9.1@47.704,-4.425 ; R6.2@47.466,-5.582 cw(c47.281,-5.813) 47.577,-5.813 ; v1@47.654,-6.779 ccw(c47.355,-7.077) 47.355,-6.655 ccw(c47.355,-6.232) v1@47.654,-6.531 ; R6.2@47.689,-5.582 ccw(c47.873,-5.813) 47.577,-5.813 ; v1(47.777,-6.655) 47.244,-6.655 47.193,-6.706 C8.1@47.193,-6.68 47.193,-6.198 ; v1(49.962,-6.655) v1@50.038,-6.655 ; v1@50.013,-6.502 50.013,-6.629 v1@50.038,-6.655 ; v1@50.086,-6.779 cw(c50.384,-7.077) 50.384,-6.655 cw(c50.384,-6.232) v1@50.086,-6.531 ; 64.279,-6.121 ccw(c64.279,-5.729) U4.21@64.556,-6.007 ; U4.21@64.821,-5.805 64.505,-6.121 63.627,-6.121 62.078,-7.671 52.426,-7.671 51.41,-6.655 v1@50.038,-6.655 ; 46.743,-3.465 C9.1@47.577,-4.299 R6.2@47.577,-5.442 47.577,-5.813 ; 47.193,-6.198 47.577,-5.813
  Bottom Layer w0.15: v1(47.777,-6.655) 49.86,-6.655 v1@50.013,-6.502 ; v1@47.901,-6.779 cw(c48.2,-7.077) 48.2,-6.655 cw(c48.2,-6.232) v1@47.901,-6.531 ; v1@49.838,-6.779 ccw(c49.539,-7.077) 49.539,-6.655 ccw(c49.539,-6.232) v1@49.838,-6.531
  Bottom Layer w0.3: 46.253,-2.87 50.825,-2.87 51.943,-3.988 P3.5@52.629,-3.988 ; v1@46.345,-3.175 ccw(c46.345,-2.327) v1@46.945,-2.926 ; v1@46.467,-2.87 cw(c46.467,-3.545) 46.945,-3.068 ccw(c46.529,-3.484) v1@46.529,-2.896 ; v1@46.56,-2.926 ccw(c47.16,-2.327) v1@47.16,-3.175 ; v1@46.583,-2.963 ccw(c46.888,-2.85) 46.888,-3.175 46.279,-3.175 46.228,-3.124 46.228,-2.896 49.428,-2.896 ; 46.743,-2.997 49.479,-2.997 ; v1@46.924,-2.956 cw(c46.584,-2.801) 46.584,-3.175 49.301,-3.175 50.19,-3.175 50.521,-3.175 50.775,-3.175 52.093,-4.493 P3.6@52.883,-4.493 ; v1@46.976,-2.896 ccw(c46.976,-3.484) 46.56,-3.068 cw(c47.037,-3.545) v1@47.037,-2.87 ; v1@47.086,-2.926 ccw(c47.686,-2.327) 47.686,-3.175 ; 47.502,-2.896 ccw(c47.502,-3.484) 47.086,-3.068 cw(c47.563,-3.545) 47.563,-2.87
  other v1: 46.489,-2.997 47.015,-2.997
pads on no net: P3.0 P3.0/2 U2.7 U4.12 U4.13 U4.17 U4.31 U4.32 U4.34 U4.35 U4.39

## Polygon pours and split planes (outlines as drawn)
GND on Top Layer "Top Layer-No Net" (solid, remove dead copper, pour order 0): -3.378,3.962 -3.378,-10.617 -4.013,-11.252 2.032,-17.297 99.111,-17.297 116.459,-17.297 122.352,-11.405 122.199,-11.252 122.199,5.817
PGND on Top Layer "Top Layer-No Net" (solid, remove dead copper, pour order 1): 49.632,-4.877 51.597,-4.877 53.227,-4.877 53.587,-4.496 54.282,-3.759 54.858,-3.759 57.566,-3.759 57.71,-3.607 57.734,-3.581 57.734,-3.429 57.734,-0.406 57.59,-0.254 56.823,-0.254 51.621,-0.254 50.83,-1.092 49.632,-2.362 49.632,-3.861
PGND on Top Layer "Top Layer-No Net" (solid, remove dead copper, pour order 2): 44.399,-3.556 44.399,-5.791 44.45,-5.842 45.11,-5.842 45.237,-5.842 45.288,-5.791 45.288,-5.74 45.288,-2.692 45.39,-2.591 45.618,-2.591 45.999,-2.591 45.999,-2.21 45.999,-0.762 45.949,-0.711 45.466,-0.711 45.237,-0.711 44.933,-1.016 44.399,-1.549 44.399,-3.099
PGND on Top Layer "Top Layer-No Net" (solid, remove dead copper, pour order 3): 38.837,-3.632 38.837,-6.045 39.776,-6.045 39.853,-5.969 39.878,-5.944 39.878,-4.064 39.878,-2.743 39.98,-2.642 40.03,-2.591 40.183,-2.591 40.691,-2.591 40.691,-2.134 40.691,-0.838 40.665,-0.813 40.64,-0.787 39.98,-0.787 39.599,-0.787 39.421,-0.965 38.837,-1.549 38.837,-1.727
PGND on Top Layer "Top Layer-No Net" (solid, remove dead copper, pour order 4): 33.503,-3.175 33.503,-5.842 33.528,-5.867 33.553,-5.893 33.579,-5.893 34.417,-5.893 34.468,-5.842 34.468,-5.766 34.468,-2.743 34.544,-2.667 34.595,-2.616 34.823,-2.616 35.382,-2.616 35.382,-2.464 35.382,-0.61 35.281,-0.508 35.154,-0.508 33.706,-0.508 33.528,-0.686
GND on Bottom Layer "Top Layer-No Net" (solid, remove dead copper, pour order 5): -1.346,1.676 -1.346,-12.395 119.151,-12.395 120.04,-11.506 119.888,-11.354 119.888,1.549
PGND on Bottom Layer "Top Layer-No Net" (solid, remove dead copper, pour order 6): 33.426,-1.27 33.426,-4.293 33.553,-4.42 33.63,-4.496 34.239,-4.496 37.49,-4.496 49.428,-4.496 49.606,-4.674 50.825,-4.674 51.791,-4.674 51.892,-4.572 51.943,-4.521 51.943,-4.089 51.943,-3.632 51.816,-3.505 51.791,-3.48 51.511,-3.48 45.39,-3.48 45.263,-3.353 45.263,-2.489 45.263,-1.575 45.136,-1.448 45.034,-1.346 44.374,-1.346 44.374,-1.372 44.018,-1.727 43.84,-1.905 43.84,-2.794 43.84,-3.429 43.637,-3.632 43.561,-3.708 43.078,-3.708 40.132,-3.708 39.853,-3.429 39.853,-2.54 39.853,-1.626 39.726,-1.499 39.7,-1.473 39.141,-1.473 38.862,-1.473 38.811,-1.524 38.557,-1.778 38.557,-1.93 38.557,-3.251 38.481,-3.327 38.43,-3.378 37.844,-3.378 35.264,-3.378 35.112,-3.226 34.773,-2.887 34.773,-2.743 34.773,-1.346 34.696,-1.27

## Keep-outs
Keep-Out Layer:
  circle w0.1: c114,-2.25 r0.5
  circle w0.1: c114,-7.25 r0.5
  circle w0.1: c96,-2.25 r0.5
  circle w0.1: c96,-7.25 r0.5
  lines w0.1: 0,-10 117,-10 117,0 0,0 0,-10

## Other copper
Top Layer:
  pour cut-out: 33.426,0 33.426,-5.919 35.202,-5.919 35.265,-5.856 49.262,-5.856 49.276,-4.318 50.546,-2.134 50.546,0

## Silkscreen, mask and mechanical layers (free items; w line width, h text height)
Top Overlay:
  circle w0.1: c2.134,-7.01 r0.564
  circle w0.1: c2.007,-2.438 r0.432
  lines w0.1: 4.877,-1.956 4.877,-2.946 5.613,-2.946
Bottom Overlay:
  text "20240324" at 115.875,-1.6 h1 r90
Mechanical 7:
  lines w0.1: 4.928,-18.415 4.928,3.607
  lines w0.127: 86.563,-17.958 86.563,3.607
Mechanical 15:
  lines w0.127: 2.794,15.164 235.001,15.164 ; 36.881,20.752 144.704,20.752 ; 76.581,0.229 76.581,29.185 ; 96.317,5.258 96.317,23.038